# Altium PCB PCB3.PcbDoc
Units mil, origin at the board's own origin, x right, y up, seen from the top; angles counter-clockwise.
Board outline 3160 x 1180 mil, 4 copper layers (Top Layer, Layer 1, Layer 2, Bottom Layer), stack 23.756 mil thick; 41 components, 28 nets, 203 pads, 54 vias.
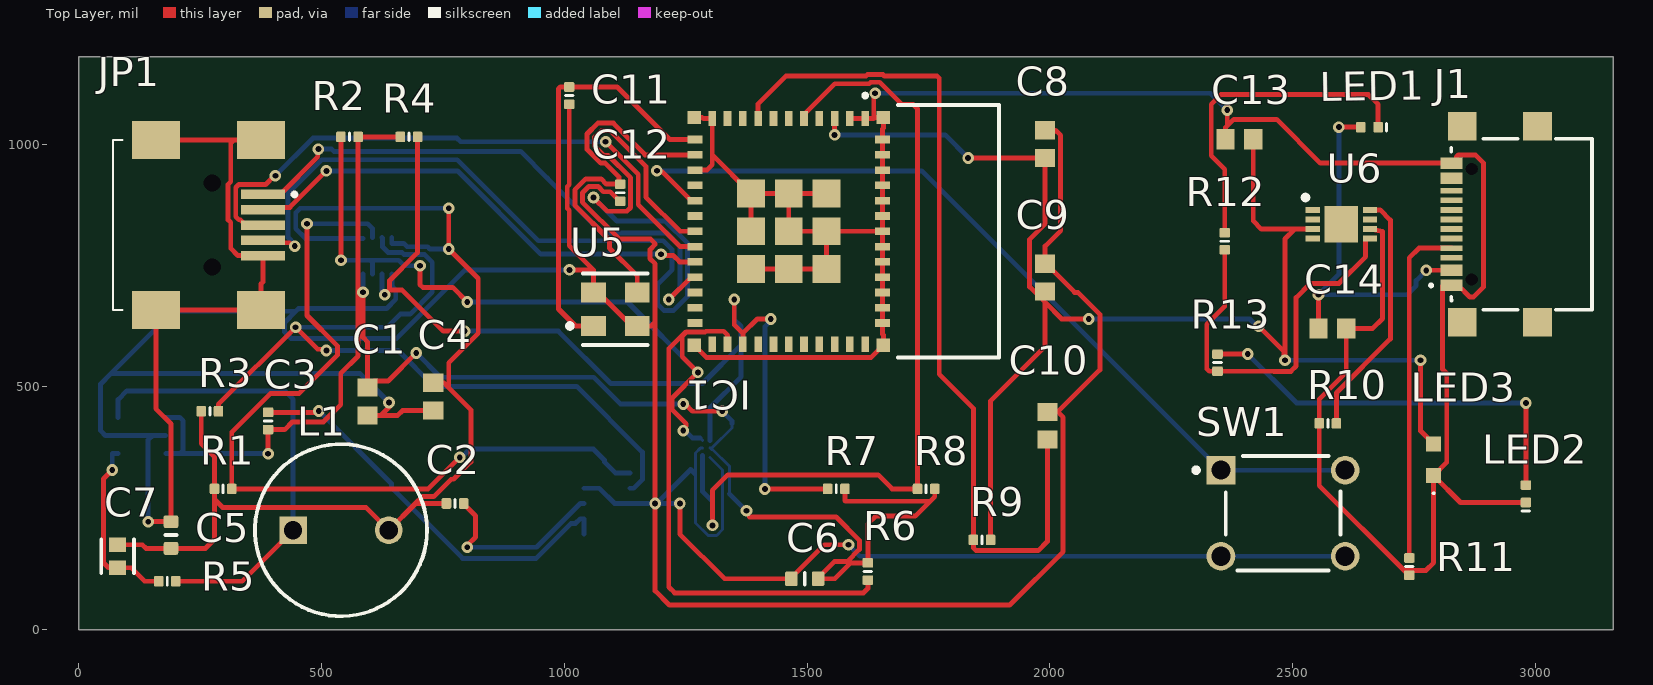
[diagram p0: Top Layer view]
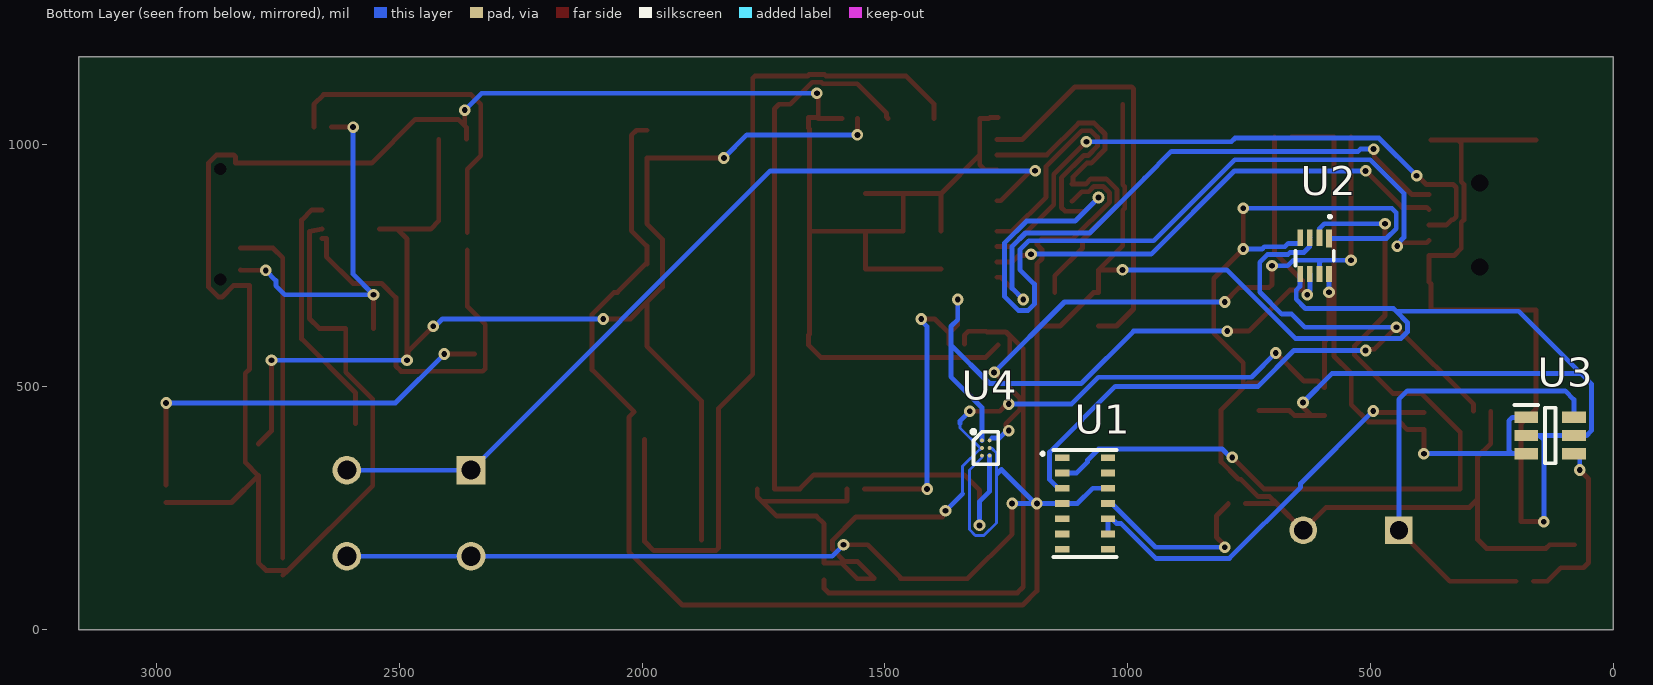
[diagram p1: Bottom Layer view, seen from below]
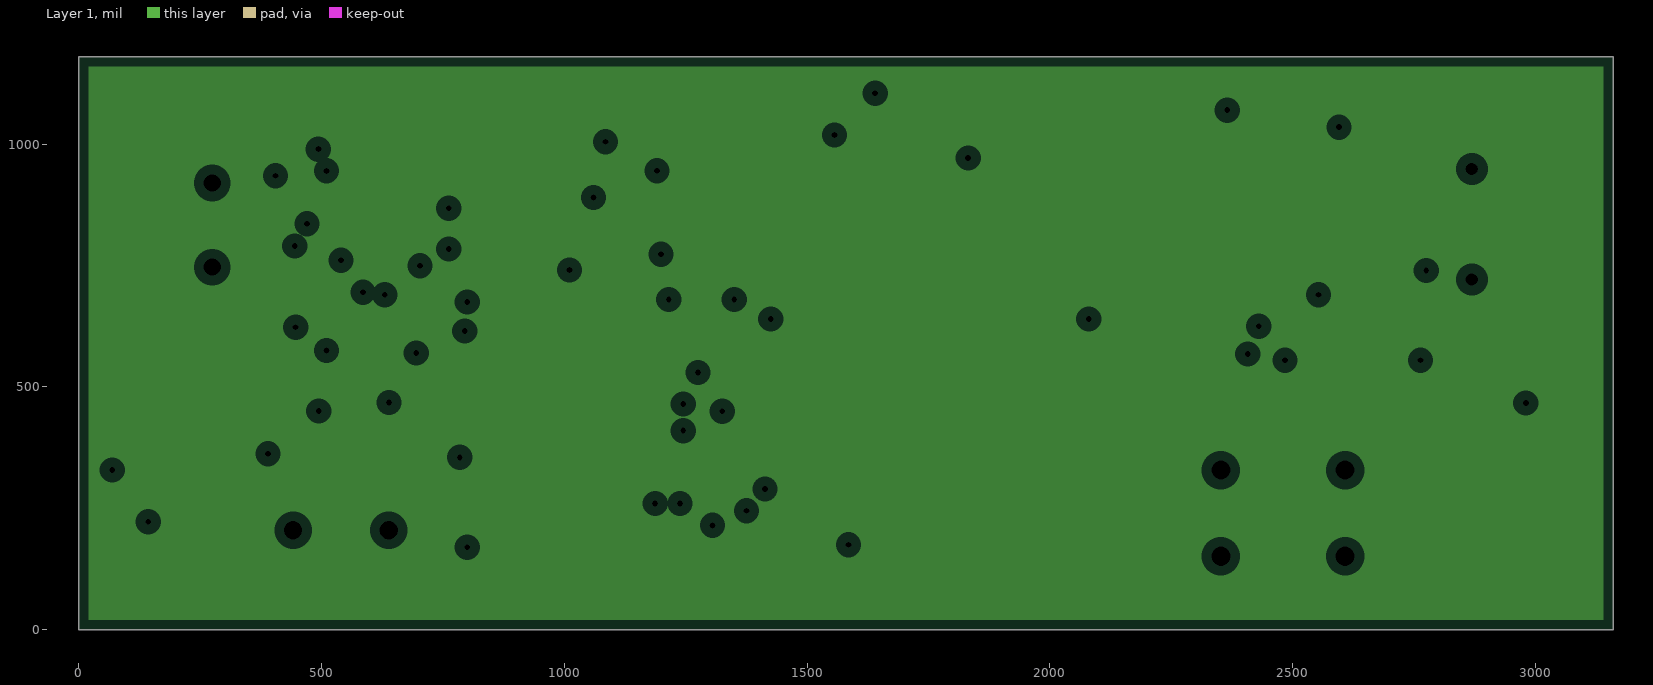
[diagram p2: Layer 1, clearances drawn from the general rule]
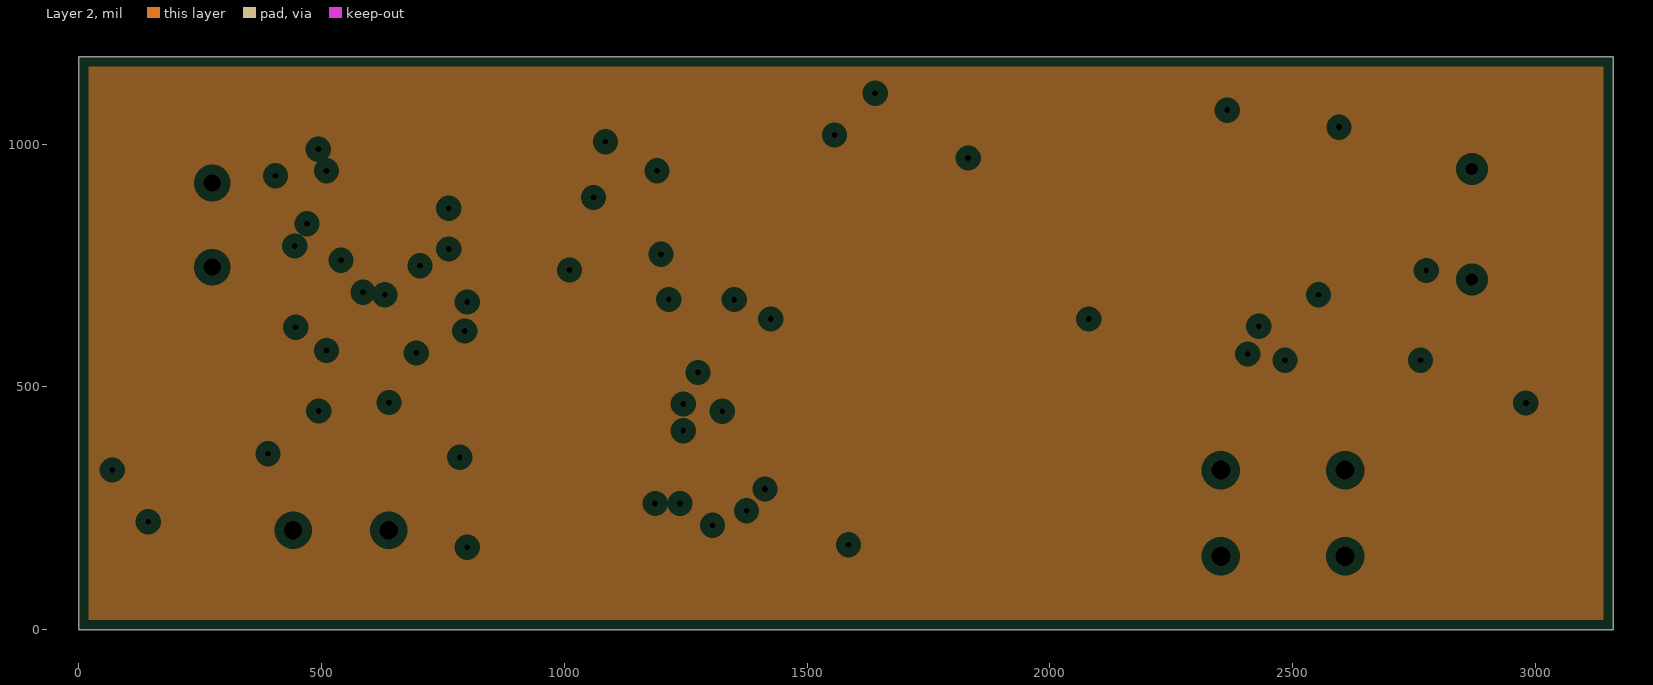
[diagram p3: Layer 2, clearances drawn from the general rule]
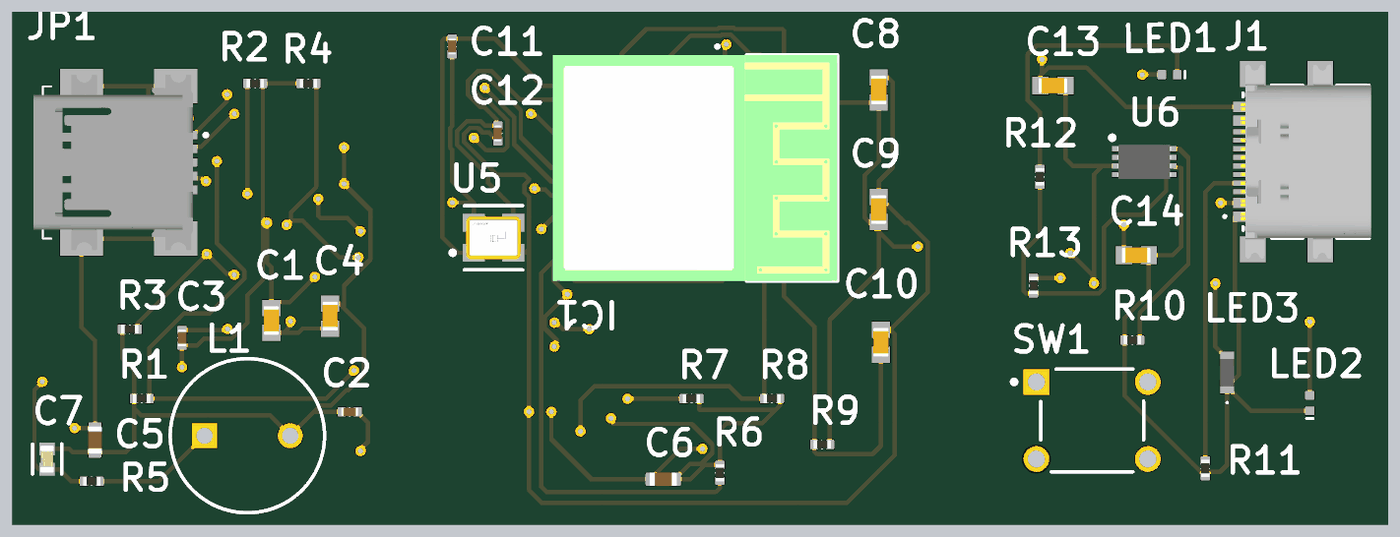
[diagram p4: 3D render of the assembled board from above, using the file's embedded part models]
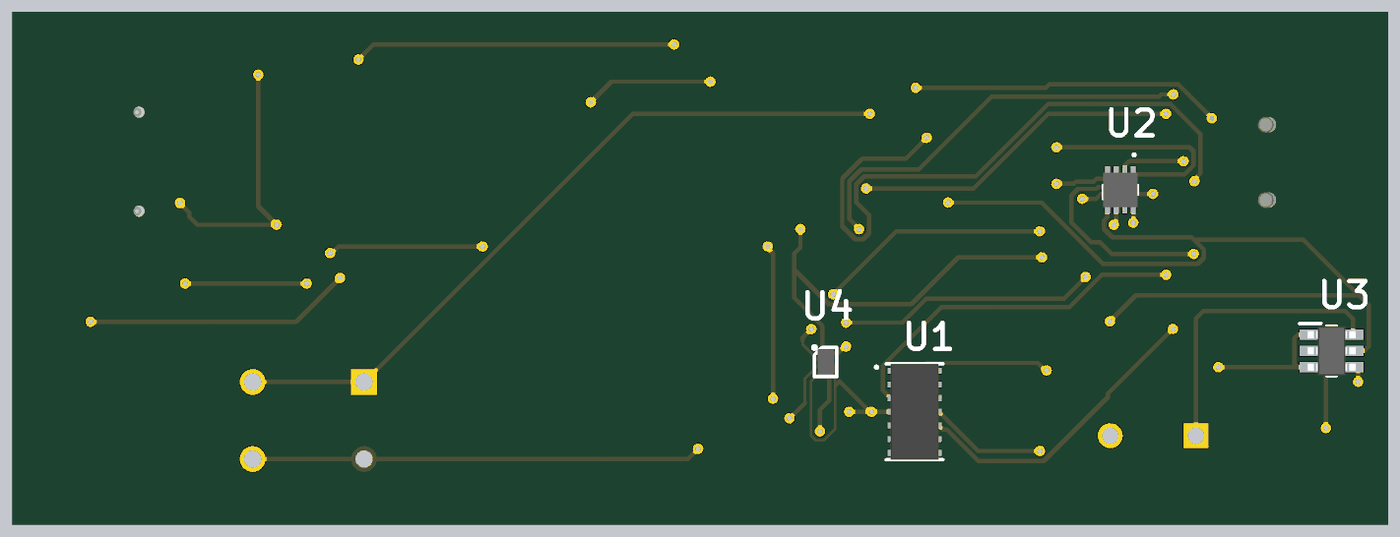
[diagram p5: 3D render of the assembled board from below, using the file's embedded part models]

## Layer stack, top to bottom
Top Solder: solder mask 0.472, FC-001, Dk 4
Top Solder: solder mask 0.4, Solder Resist, Dk 3.5
Top Layer: signal copper 1.4
Dielectric 2: prepreg 2.8, PP-006, Dk 4.1
Layer 1: plane copper 1.378
Dielectric 1: dielectric 12.6, FR-4, Dk 4.8
Layer 2: plane copper 1.378
Dielectric 3: prepreg 2.8, PP-006, Dk 4.1
Bottom Layer: signal copper 1.4
Flex Bottom Coverlay: solder mask 0.4, Solder Resist, Dk 3.5
Flex Bottom Coverlay: solder mask 0.472, FC-001, Dk 4

## Board outline
0,0 3160,0 3160,1180 0,1180
board region "Default Layer Stack Region": 835,0 0,0 0,1180 835,1180
board region "Default Layer Stack Region": 2245,1180 3160,1180 3160,0 2245,0
board region Flex2: 2125,1180 2245,1180 2245,0 2125,0
board region "Default Layer Stack Region": 965,1180 2125,1180 2125,0 965,0
board region Flex1: 835,1180 965,1180 965,0 835,0

## Design rules (kind name [scope] priority, off if disabled: settings)
Clearance Polygon_ANT [(InNamedPolygon('Top_Layer-GND')) or  (InNamedPolygon('Mid_Layer_1-GND')) or (InNamedPolygon('Mid_Layer_2-GND')) or (InNamedPolygon('Bottom_Layer-GND')) vs InNet('RF')] p1: gap=10 ignorepadtopadclearanceinfootprint=FALSE
Clearance Polygon [(InNamedPolygon('Top_Layer-GND')) or  (InNamedPolygon('Mid_Layer_1-GND')) or (InNamedPolygon('Mid_Layer_2-GND')) or (InNamedPolygon('Bottom_Layer-GND'))] p2: gap=10 ignorepadtopadclearanceinfootprint=FALSE except(0: Arc-Hole Track-Hole SMDPad-Hole THPad-Hole Via-Hole Fill-Hole Poly-Hole Region-Hole Text-Hole)
Clearance Clearance_Top [OnLayer('Top Layer')] p3: gap=5.71 ignorepadtopadclearanceinfootprint=FALSE except(0: Arc-Hole Track-Hole SMDPad-Hole THPad-Hole Via-Hole Fill-Hole Poly-Hole Region-Hole Text-Hole)
Clearance [All] p4: gap=5.91 ignorepadtopadclearanceinfootprint=FALSE
ComponentClearance [All] p1 off: gap=10 collisioncheckmode=3 verticalgap=10 showdistances=FALSE
DiffPairsRouting [All] p1: maxlimit=10 minlimit=10 mostfreqgap=10 toplayer_minwidth=15 toplayer_maxwidth=15 toplayer_prefwidth=15 bottomlayer_minwidth=15 bottomlayer_maxwidth=15 bottomlayer_prefwidth=15 substack1={EE8BA033-E28F-4276-8F34-0FAD93AC0668} toplayer_{ee8ba033-e28f-4276-8f34-0fad93ac0668}_minwidth=15 toplayer_{ee8ba033-e28f-4276-8f34-0fad93ac0668}_maxwidth=15 toplayer_{ee8ba033-e28f-4276-8f34-0fad93ac0668}_prefwidth=15 bottomlayer_{ee8ba033-e28f-4276-8f34-0fad93ac0668}_minwidth=15 bottomlayer_{ee8ba033-e28f-4276-8f34-0fad93ac0668}_maxwidth=15 bottomlayer_{ee8ba033-e28f-4276-8f34-0fad93ac0668}_prefwidth=15 maxuncoupledlength=500
FabricationTestPointUsage TestPointUsage [All] p1: valid=0 allowmultiple=FALSE
FabricationTestpoint Testpoint [All] p1: side=3 testpointundercomponent=TRUE minsize=40 maxsize=100 preferedsize=60 minholesize=0 maxholesize=40 preferedholesize=32 testpointgrid=1 allowsidetop=TRUE allowsidebottom=TRUE usegrid=TRUE gridtolerance=0.01
Height [All] p1 off: minheight=0 maxheight=1000 prefheight=500
HoleSize [All] p1: absolutevalues=TRUE maxlimit=396.22 minlimit=5.91 maxpercent=80.000 minpercent=20.000
MinimumAnnularRing [All] p1 off: minimumring=6
MinimumSolderMaskSliver [All] p1: minsoldermaskwidth=2
PlaneClearance [All] p1: clearance=20
PlaneConnect [All] p1: planeconnectstyle=Relief reliefexpansion=20 reliefentries=4 reliefconductorwidth=10 reliefairgap=10
PolygonConnect [All] p1: connectstyle=Relief reliefconductorwidth=10 reliefentries=4 polygonreliefangle="90 Angle" airgapwidth=10
RoutingVias [All] p1: holewidth=12 width=24 viastyle="Through Hole" minholewidth=3.94 minwidth=11.81 maxholewidth=12 maxwidth=24
SilkToSilkClearance [All] p1: silktosilkclearance=2
SilkToSolderMaskClearance SilkscreenOverComponentPads [IsPad] p1: minsilkscreentomaskgap=2 clearancetoexposedcopper=TRUE
SolderMaskExpansion [All] p1: expansion=2 istentingtop=FALSE
Width [OnLayer('Top Layer')] p1: maxlimit=20.08 minlimit=5.71 preferedwidth=10 substack1={EE8BA033-E28F-4276-8F34-0FAD93AC0668}
19 further rules are at their usual default settings.

## Classes and differential pairs
component class "Temp sensor": R6 R7 R8 U4
component class Protocol: JP1
component class Power: C13 C14 J1 LED1 LED2 LED3 R10 R11 R12 R13 U6
component class Microcontroller: C8 C9 C10 IC1 R9
component class "Heart rate and pulse oximeter": C1 C2 C3 C4 C5 C6 C7 L1 R1 R2 R3 R4 R5 U1 U2 U3
component class "Crystal Oscillator": C11 C12 U5
component class Button: SW1

## Components (designator, comment, footprint, x,y, rotation, side; value= is the part's Value field where it differs from the comment)
C1 "0.1uF" CAPC1608X90X35ML10T15 595,470 r90 top
C2 "Capacitor 1µF +/-20% 10V 0402" CAPC0402(1005)60_L 775,260 r0 top value=1µF
C3 "Capacitor 1µF +/-20% 10V 0402" CAPC0402(1005)60_L 390,430 r90 top value=1µF
C4 "0.1uF" CAPC1608X90X35ML10T15 730,480 r90 top
C5 "Capacitor 4.7µF +/-20% 10V 0603" CAPC0603(1608)100_L 190,195 r90 top value=4.7µF
C6 "Capacitor 4.7µF +/-20% 10V 0603" CAPC0603(1608)100_L 1495,105 r0 top value=4.7µF
C7 "5.6nF" FP-C0603C-CF-MFG 80,151.38 r90 top value="5,600 pF"
C8 "0.1uF" CAPC1608X90X35ML10T15 1990,1000 r90 top
C9 "0.1uF" CAPC1608X90X35ML10T15 1990,725 r90 top
C10 "0.1uF" CAPC1608X90X35ML10T15 1995,420 r90 top
C11 "Capacitor 12pF +/-10% 50V 0402" CAPC0402(1005)33_L 1010,1100 r90 top value=12pF
C12 "Capacitor 12pF +/-10% 50V 0402" CAPC0402(1005)33_L 1115,900 r90 top value=12pF
C13 "10uF" CAPC1608X90X35ML10T15 2390,1010 r0 top
C14 "10uF" CAPC1608X90X35ML10T15 2581.46,620 r0 top
IC1 "ESP32-C3-MINI-1-H4" ESP32C3MINI1H4 1462.09,820.51 r270 top
J1 "GSB1C41110SSHR" GSB1C41110SSHR 2960,835 r90 top
JP1 "690-005-299-043" 690005299043 70.28,833.39 r0 top
L1 "RLB9012-472KL" INDR70-500-1220X900X1220 540,205 r0 top value=4.7µH
LED1 "QBLP595-Y" QTB-QBLP595_V 2657.91,1035 r180 top
LED2 "QBLP595-Y" QTB-QBLP595_V 2980,280 r90 top
LED3 "CSL1001BT1C" CSL1001BT1C 2790,350 r0 top
R1 "4D7KR2F" RESC0402(1005)_L 297.28,290 r0 top value=4.7k
R2 "4D7KR2F" RESC0402(1005)_L 557.72,1015 r0 top value=4.7k
R3 "4D7KR2F" RESC0402(1005)_L 270,450 r0 top value=4.7k
R4 "4D7KR2F" RESC0402(1005)_L 680,1015 r0 top value=4.7k
R5 "4D7KR2F" RESC0402(1005)_L 182.28,100 r0 top value=4.7k
R6 "Resistor 5K6  +/-5 % 0402 63 mW" RESC0402(1005)_L 1625,120 r90 top value=5.6k
R7 "Resistor 5K6  +/-5 % 0402 63 mW" RESC0402(1005)_L 1560,290 r0 top value=5.6k
R8 "Resistor 5K6  +/-5 % 0402 63 mW" RESC0402(1005)_L 1745,290 r0 top value=5.6k
R9 "Resistor 2K2  +/-5 % 0402 63 mW" RESC0402(1005)_L 1860,185 r0 top value=2.2k
R10 "2KR2J" RESC0402(1005)_L 2572.28,425 r180 top value=2k
R11 "Resistor 4K7  +/-1 % 0402 63 mW" RESC0402(1005)_L 2740,130 r90 top value=4.7k
R12 "1KR2J" RESC0402(1005)_L 2360,800 r90 top value=1k
R13 "Resistor 4K7  +/-1 % 0402 63 mW" RESC0402(1005)_L 2345,550 r90 top value=4.7k
SW1 "B3F-1000" OMRON-B3F-1000-4_V 2480,240 r0 top
U1 "MAX30102EFD+" 14-LEAD-OESIP 1087.76,260 r180 bottom
U2 "MAX14595ETA+" MAX14595ETA 615,770 r0 bottom
U3 "MAX1921EUT18+" SOT95P280X145-6N 130,400 r180 bottom
U4 "TMP119AIYBGR" BGA6C40P2X3_95X149X52 1292.13,374.25 r180 bottom
U5 "ABM8-27.120MHZ-B4-T" FP-ABM8-MFG 1105,660 r0 top
U6 "MCP73831-2DCI_MC" SON50P300X200X100-9N-D 2600,835 r0 top

## Footprints (in the part's own frame and the unit in brackets; to place one, negate y for a bottom-side part, rotate by r counter-clockwise, add the part's x,y. Pads: shape width x height; smd on the part's side, far side on the other; paste and mask are expansions set on the pad)
14-LEAD-OESIP [mm]
  rect 0.75x0.35 smd: 1(-1.2,2.4) 2(-1.2,1.6) 3(-1.2,0.8) 4(-1.2,0) 5(-1.2,-0.8) 6(-1.2,-1.6) 7(-1.2,-2.4) 8(1.2,-2.4) 9(1.2,-1.6) 10(1.2,-0.8) 11(1.2,0) 12(1.2,0.8) 13(1.2,1.6) 14(1.2,2.4)
  silkscreen extent -2.28,-2.8 1.65,2.8, body extent -1.4,-2.8 1.4,2.8, height 1.3
690005299043 [mm]
  rect 2.3x0.5 smd: 1(7.85,1.6) 2(7.85,0.8) 3(7.85,0) 4(7.85,-0.8) 5(7.85,-1.6)
  rect 2.5x2 smd: 6(7.75,-4.45) 7(7.75,4.45) 8(2.25,4.45) 9(2.25,-4.45)
  round 0.45 hole 0.9 unplated: 10(5.2,2.2) 11(5.2,-2.2)
  silkscreen extent 0,-4.45 9.6,4.45, body extent -0.54,-5.13 8.76,5.13, height 3.9
BGA6C40P2X3_95X149X52 [mm]
  round 0.2 smd: A1(-0.2,0.4) A2(0.2,0.4) B1(-0.2,0) B2(0.2,0) C1(-0.2,-0.4) C2(0.2,-0.4)
  silkscreen extent -0.75,-0.85 0.65,0.95, body extent -0.48,-0.74 0.48,0.74, height 0.53
CAPC0402(1005)33_L [mm] "Chip Capacitor, Body 1.0x0.5mm, Height 0.33mm, IPC High Density"
  rrect25% 0.5x0.55 smd: 1(-0.45,0) 2(0.45,0)
  silkscreen extent 0,-0.2 0,0.2, body extent -0.5,-0.25 0.5,0.25, height 0.55
CAPC0402(1005)60_L [mm] "Chip Capacitor, Body 1.0x0.5mm, Height 0.6mm, IPC High Density"
  rrect25% 0.5x0.55 smd: 1(-0.45,0) 2(0.45,0)
  silkscreen extent 0,-0.2 0,0.2, body extent -0.5,-0.25 0.5,0.25, height 0.6
CAPC0603(1608)100_L [mil] "Chip Capacitor, Body 1.6x0.8mm, Height 1.0mm, IPC High Density"
  rrect25% 26x29.92 smd: 1(-27.56,0) 2(27.56,0)
  silkscreen extent 0,-12 0,12, body extent -31,-16 31,16, height 37
CAPC1608X90X35ML10T15 [mm] "Chip Capacitor, 2-Leads, Body 1.7x0.9mm, IPC Low Density"
  rect 0.95x1.05 smd: 1(-0.725,0) 2(0.725,0)
  body extent -0.85,-0.45 0.85,0.45, height 0.9
CSL1001BT1C [mm]
  rect 0.8x0.8 smd: 1(0,-0.825) 2(0,0.825)
  silkscreen extent -0.05,-1.8 0.05,-1.7, body extent -0.4,-0.8 0.4,0.8, height 1.26
ESP32C3MINI1H4 [mm]
  rect 0.8x0.4 smd: 1(-5.9,4) 2(-5.9,3.2) 3(-5.9,2.4) 4(-5.9,1.6) 5(-5.9,0.8) 6(-5.9,0) 7(-5.9,-0.8) 8(-5.9,-1.6) 9(-5.9,-2.4) 10(-5.9,-3.2) 11(-5.9,-4) 25(5.9,-4) 26(5.9,-3.2) 27(5.9,-2.4) 28(5.9,-1.6) 29(5.9,-0.8) 30(5.9,0) 31(5.9,0.8) 32(5.9,1.6) 33(5.9,2.4) 34(5.9,3.2) 35(5.9,4)
  rect 0.4x0.8 smd: 12(-4.8,-4.9) 13(-4,-4.9) 14(-3.2,-4.9) 15(-2.4,-4.9) 16(-1.6,-4.9) 17(-0.8,-4.9) 18(0,-4.9) 19(0.8,-4.9) 20(1.6,-4.9) 21(2.4,-4.9) 22(3.2,-4.9) 23(4,-4.9) 24(4.8,-4.9) 36(4.8,4.9) 37(4,4.9) 38(3.2,4.9) 39(2.4,4.9) 40(1.6,4.9) 41(0.8,4.9) 42(0,4.9) 43(-0.8,4.9) 44(-1.6,4.9) 45(-2.4,4.9) 46(-3.2,4.9) 47(-4,4.9) 48(-4.8,4.9)
  rect 1.45x1.45 smd: 49(0,0) 50(1.975,1.975) 51(0,1.975) 52(-1.975,1.975) 53(-1.975,0) 54(-1.975,-1.975) 55(0,-1.975) 56(1.975,-1.975) 57(1.975,0)
  rect 0.7x0.7 smd: 58(-5.95,4.95) 59(-5.95,-4.95) 60(5.95,-4.95) 61(5.95,4.95)
  silkscreen extent -7.2,3.9 6.6,11, body extent -6.6,-5.6 6.6,11, height 2.4
FP-ABM8-MFG [mm]
  rect 1.3x1.05 smd paste+0 mask+0: 1(-1.15,-0.875) 2(1.15,-0.875) 3(1.15,0.875) 4(-1.15,0.875)
  silkscreen extent -2.5,-1.87 1.7,1.87, body extent -1.9,-1.5 1.9,1.5, height 0.25
FP-C0603C-CF-MFG [mm]
  rect 0.75x0.9 smd paste+0 mask+0: 1(-0.6,0) 2(0.6,0)
  silkscreen extent -0.87,-0.85 0.88,0.85, body extent -1.2,-0.6 1.2,0.6, height 0.25
GSB1C41110SSHR [mm]
  rect 0.6x1.15 smd: A1(-3.2,3.39) A4(-2.4,3.39) A9(2.4,3.39) A12(3.2,3.39)
  rect 0.3x1.15 smd: A5(-1.25,3.39) A6(-0.25,3.39) A7(0.25,3.39) A8(1.25,3.39) B5(1.75,3.39) B6(0.75,3.39) B7(-0.75,3.39) B8(-1.75,3.39)
  round 0.325 hole 0.65 unplated: MH1(-2.89,2.315) MH2(2.89,2.315)
  rect 1.5x1.5 smd: MP1(-5.12,2.815) MP2(5.12,2.815) MP3(-5.12,-1.115) MP4(5.12,-1.115)
  silkscreen extent -4.47,-3.96 4.47,4.5, body extent -5.67,-4.09 5.67,3.51, height 3.12
INDR70-500-1220X900X1220 [mm] "THD, 2-Leads, Dia 9mm"
  rect 1.45x1.45 hole 0.95: 1(-2.5,0)
  round 1.45 hole 0.95: 2(2.5,0)
  silkscreen extent -4.5,-4.5 4.5,4.5, body extent -4.5,-4.5 4.5,4.5, height 12.2
MAX14595ETA [mm]
  rect 0.3x0.95 smd: 1(-0.75,-0.9)
  rect 0.3x0.85 smd: 2(-0.25,-0.95) 3(0.25,-0.95) 4(0.75,-0.95) 5(0.75,0.95) 6(0.25,0.95) 7(-0.25,0.95) 8(-0.75,0.95)
  silkscreen extent -1,-2.1 1,0.5, body extent -1,-1 1,1, height 0.9
OMRON-B3F-1000-4_V [mm] "TH, 4-Leads, Body 6x6mm"
  rect 1.5x1.5 hole 1 paste-2539.97: 1(-3.25,2.25)
  round 1.5 hole 1 paste-2539.97: 2(3.25,2.25) 4(3.25,-2.25)
  round 1.5 hole 1 paste-2539.97 mask+0.102: 3(-3.25,-2.25)
  silkscreen extent -4.67,-3 3,3, body extent -3,-3 3,3, height 4.5
QTB-QBLP595_V [mm] "SMD, 2-Leads, Body 1x0.5mm"
  rrect25% 0.5x0.55 smd: 1(-0.455,0) 2(0.455,0)
  silkscreen extent -0.9,-0.2 -0.9,0.2, body extent -0.5,-0.25 0.5,0.25, height 0.5
RESC0402(1005)_L [mm] "Chip Resistor, Body 1.0x0.5mm, IPC High Density"
  rrect25% 0.5x0.55 smd: 1(-0.45,0) 2(0.45,0)
  silkscreen extent 0,-0.2 0,0.2, body extent -0.5,-0.25 0.5,0.25, height 0.3
SON50P300X200X100-9N-D [mm]
  rect 0.75x0.3 smd: 1(-1.5,0.75) 2(-1.5,0.25) 3(-1.5,-0.25) 4(-1.5,-0.75) 5(1.5,-0.75) 6(1.5,-0.25) 7(1.5,0.25) 8(1.5,0.75)
  rect 1.75x1.9 smd: 9(0,0)
  silkscreen extent -2,1.28 -1.75,1.52, body extent -1.55,-1 1.55,1, height 1
SOT95P280X145-6N [mm]
  rect 1.25x0.6 smd: 1(-1.25,0.95) 2(-1.25,0) 3(-1.25,-0.95) 4(1.25,-0.95) 5(1.25,0) 6(1.25,0.95)
  silkscreen extent -1.87,-1.45 0.27,1.6, body extent -1.4,-1.45 1.4,1.45, height 1.45

## Part data
C1 C4 C8 C9 C10 C13 C14: library part CMP-2100-03643-1, "Chip Capacitor, 0.1 uF, +/- 10%, 50 V, -55 to 125 degC, 0603 (1608 Metric), RoHS, Tape and Reel", Capacitance=100nF, Case Code (Imperial)=0603, Case Code (Metric)=1608, Dielectric=X7R, Dielectric Material=Ceramic, Insulation Resistance=10GR, Manufacturer=Murata, Max Operating Temperature=125degC, Min Operating Temperature=-55degC, Package Description="2-Pin Surface Mount Device, Body 1.6 x 0.8 mm", Package Quantity=1, Tolerance=10%, Voltage=50V, Case/Package=0603, Contact Plating=Tin, Datasheet URL=http://psearch.en.murata.com/capacitor/product/GRM188R71H104KA93%23.pdf, Datasheet Version=42675.0, Depth=0.8mm, Height=0.8mm, Lead Free=LeadFree, Length=1.6mm, Manufacturer URL=http://www.murata.com/, Material=Ceramic, Mount=SurfaceMount, Number of Pins=2, Package Reference=0603, Packaging=TapeandReel, Radiation Hardening=No, REACH SVHC=NoSVHC, RoHSCompliant=true, Termination=SMD/SMT, Thickness=0.035inch, Voltage Rating=50V, Voltage Rating (DC)=50V, Width=0.8mm
C2 C3: library part CMP-001-00063-3, "Chip Capacitor, 1µF +/-20%, 10V, 0402, Thickness 0.6 mm", Case/Package=0402, Max Operating Temperature=85°C, Min Operating Temperature=-55°C, Tolerance=10%, Voltage Rating=10V, Mounting Technology=SMT, Pins=2
C5 C6: library part CMP-001-00076-4, "Chip Capacitor, 4.7µF +/-20%, 10V, 0603, Thickness 1 mm", Case/Package=0603, Max Operating Temperature=85°C, Min Operating Temperature=-55°C, Tolerance=10%, Voltage Rating=10V, Mounting Technology=SMT, Pins=2
C7: library part CMP-2006-03359-2, "CAP CER 5600PF 50V NP0 0603", Capacitance="5,600 pF", Manufacturer=KEMET, Manufacturer Part Number=C0603C562J5GACTU, Package=C0603C-CF, Temperature="-55°C to +125°C", Temperature Characteristic=C0G, Temperature Coefficient=30ppm/°C, Temperature Range High=+125°C, Temperature Range Low=-55°C, Tolerance=0.05, Voltage Rating="50 V", Automotive=Yes, Automotive Grade="Grade 1", Category=Cap, ComponentLink2Description=Datasheet, ComponentLink2URL=https://api.kemet.com/component-edge/download/datasheet/C0603C100J5GACAUTO.pdf, Device Class L1="Passive Components", Device Class L2=Capacitors, Device Class L3="Ceramic Capacitors", Digikey Description="CAP CER 5600PF 50V NP0 0603", Height=0.87mm, Lead Free=Yes, Material=Ceramic, Mouser Description="Multilayer Ceramic Capacitors MLCC - SMD/SMT 50volts 5600pF 5% C0G", Octopart=https://octopart.com/c0603c562j5gactu-kemet-13174209, RoHS=TRUE
C11 C12: library part CMP-001-00072-4, "Chip Capacitor, 12pF +/-10%, 50V, 0402, Thickness 0.33 mm", Case/Package=0402, Max Operating Temperature=85°C, Min Operating Temperature=-55°C, Tolerance=20%, Voltage Rating=50V, Mounting Technology=SMT, Pins=2
IC1: "Integrated Circuit", Manufacturer_Name="Espressif Systems", Mouser Part Number=356-ESP32-C3-MINI1H4, Datasheet Link=https://www.mouser.es/datasheet/2/891/Espressif_ESP32_C3_MINI_1_Datasheet-2006822.pdf, Height=2.55mm, Manufacturer_Part_Number=ESP32-C3-MINI-1-H4, Mouser Price/Stock=https://www.mouser.co.uk/ProductDetail/Espressif-Systems/ESP32-C3-MINI-1-H4?qs=stqOd1AaK78JkwNX13Q9hQ%3D%3D
J1: "Connector", Manufacturer_Name="Amphenol Communications Solutions", Datasheet Link=https://cdn.amphenol-cs.com/media/wysiwyg/files/drawing/gsb1c41x10sshr-ax1.pdf, Height=3.41mm, Manufacturer_Part_Number=GSB1C41110SSHR
JP1: "Connector", Manufacturer_Name=EDAC, Mouser Part Number=587-690-005-299-043, Datasheet Link=https://datasheet.datasheetarchive.com/originals/distributors/Datasheets-DGA2/216278.pdf, Height=3.98mm, Manufacturer_Part_Number=690-005-299-043, Mouser Price/Stock=https://www.mouser.co.uk/ProductDetail/EDAC/690-005-299-043?qs=Vpv2%252BhtnxQIs8OWWDFbyVg%3D%3D
L1: library part CMP-006-00016-6, "Radial Inductor, 4.7 mH, +/- 10%, 0.24 A, -55 to 125 degC, 2-Pin THD, RoHS, Bulk", Case/Package=Radial, Current Rating=240mA, Inductance Tolerance=5%, Manufacturer=Bourns, Max Operating Temperature=125°C, Min Operating Temperature=-55°C, Package Description="2-Pin Through Hole Device, Dia 9 mm, Height 12.2 mm", Package Quantity=200, Package Reference=INDR70-500-1220X900X1220, Self Resonant Frequency=500kHz, Tolerance=10%, Core Material=Ferrite, Datasheet URL=http://www.bourns.com/docs/Product-Datasheets/rlb9012.pdf, Datasheet Version=Mar-15, Lead Pitch=5mm, Mounting Technology=TH, Packaging=Bulk, Pins=2, Q Factor=15, RoHS Compliant=True, Shielding=Unshielded
LED1 LED2: library part CMP-007-00043-3, "Chip LED 0402, Yellow, 0.02 A, 3.1 to 3.7 V, -40 to 80 degC, 2-Pin SMD, RoHS, Tape and Reel", Case/Package=0402, Colour=Yellow, Mounting Technology=SMT, Pins=2, RoHS Compliant=Yes
LED3: "LED", Manufacturer_Name="ROHM Semiconductor", Mouser Part Number=755-CSL1001BT1C, Datasheet Link=https://fscdn.rohm.com/en/products/databook/datasheet/opto/led/chip_mono/csl1001bt1(c)-e.pdf, Height=1.16mm, Manufacturer_Part_Number=CSL1001BT1C, Mouser Price/Stock=https://www.mouser.co.uk/ProductDetail/ROHM-Semiconductor/CSL1001BT1C?qs=HoCaDK9Nz5fqNTX3Pg0ReA%3D%3D
R1 R2 R3 R4 R5: library part CMP-009-00105-2, "4K7 0.063W 1% 0402 (1005 Metric)  SMD", Case/Package=0402, Power=63mW, Tolerance=1%, Mounting Technology=SMT, Pins=2
R6 R7 R8: library part CMP-009-00136-3, "Chip Resistor, 5,6 kOhms, +/-5 %, 63 mW, -55 to 155 degC, 0402", Case/Package=0402, Max Operating Temperature=155°C, Min Operating Temperature=-55°C, Power=63mW, Tolerance=5%, Pins=2
R9: library part CMP-009-00166-3, "Chip Resistor, 2,2 kOhms, +/-5 %, 63 mW, -55 to 155 degC, 0402", Case/Package=0402, Max Operating Temperature=155°C, Min Operating Temperature=-55°C, Power=63mW, Tolerance=5%, Pins=2
R10: library part CMP-009-00091-2, "2K 0.063W 5% 0402 (1005 Metric)  SMD", Case/Package=0402, Power=63mW, Tolerance=5%, Mounting Technology=SMT, Pins=2
R11 R13: library part CMP-009-00158-3, "Chip Resistor, 4,7 kOhms, +/-1 %, 63 mW, -55 to 155 degC, 0402", Case/Package=0402, Max Operating Temperature=155°C, Min Operating Temperature=-55°C, Power=63mW, Tolerance=1%, Pins=2
R12: library part CMP-009-00075-2, "1K 0.063W 5% 0402 (1005 Metric)  SMD", Case/Package=0402, Power=63mW, Tolerance=5%, Mounting Technology=SMT, Pins=2
SW1: library part CMP-1677-00002-1, "Tactile Switch, SPST-NO, 0.05 A, 5 to 24 V, -25 to 70 degC, 4-Pin THD, RoHS, Bulk", Capacitance="-45 f", Current Rating="1.5 A", Max Operating Temperature="70 degC", Min Operating Temperature="-40 degC", Package Quantity=1080, Voltage Rating="150 V", ComponentLink1Description="Manufacturer URL", ComponentLink1URL=http://www.omron.com/, ComponentLink2Description=Datasheet, ComponentLink2URL=http://www.omron.com/ecb/products/pdf/en-b3f.pdf, Contact Material=Brass, Contact Plating=Gold, DatasheetVersion=Jan-15, Gender=Female, Height="14.99 mm", Lead Pitch="1.27 mm", Length="18.34 mm", Mount="Through Hole", PackageDescription="4-Pin Through Hole Device, Body 6 x 6 mm", PackageReference=B3F-1000, Packaging=Tray, Pins=8, Radiation Hardening=No, RoHSCompliant=true, Shielding=Shielded, Width="25.4 mm"
U1: "Integrated Circuit", Manufacturer_Name="Analog Devices", Mouser Part Number=700-MAX30102EFD+, Datasheet Link=https://datasheets.maximintegrated.com/en/ds/MAX30102.pdf, Manufacturer_Part_Number=MAX30102EFD+, Mouser Price/Stock=https://www.mouser.co.uk/ProductDetail/Analog-Devices-Maxim-Integrated/MAX30102EFD%2b?qs=nVS1qgv%252BQrk9UYEvS27V%2Fg%3D%3D
U2: "Integrated Circuit", Manufacturer_Name="Analog Devices", Mouser Part Number=700-MAX14595ETA+, Datasheet Link=https://www.mouser.it/datasheet/2/256/MAX14595-471922.pdf, Height=0.8mm, Manufacturer_Part_Number=MAX14595ETA+, Mouser Price/Stock=https://www.mouser.co.uk/ProductDetail/Maxim-Integrated/MAX14595ETA%2b?qs=Or6ezLSzmEvDejm1TC8ZVA%3D%3D
U3: "Integrated Circuit", Manufacturer_Name="Analog Devices", Datasheet Link=https://datasheet.datasheetarchive.com/originals/distributors/SFDatasheet-4/sf-00087114.pdf, Height=1.45mm, Manufacturer_Part_Number=MAX1921EUT18+
U4: "Integrated Circuit", Manufacturer_Name="Texas Instruments", Mouser Part Number=595-TMP119AIYBGR, Datasheet Link=https://www.ti.com/lit/ds/symlink/tmp119.pdf?ts=1711471230059&ref_url=https%253A%252F%252Fwww.ti.com%252Fsitesearch%252Fen-us%252Fdocs%252Funiversalsearch.tsp%253FlangPref%253Den-US%2526searchTerm%253Dtmp119%2526nr%253D70, Height=0.525mm, Manufacturer_Part_Number=TMP119AIYBGR, Mouser Price/Stock=https://www.mouser.co.uk/ProductDetail/Texas-Instruments/TMP119AIYBGR?qs=dbcCsuKDzFUz%2FSabBerKMA%3D%3D
U5: library part CMP-27762-000994-1, "Crystal 27.12MHz ±30ppm 18pF SMD-4 3.2mm x 2.5mm", Capacitance=1.8E-11F, Case/Package=SMD/SMT, ESR (Equivalent Series Resistance)=50R, Frequency=27.12MHz, Frequency Stability=50ppm, Frequency Tolerance=30ppm, Load Capacitance=18pF, Max Operating Temperature=70°C, Min Operating Temperature=-20°C, Height=0.031inch, Lead Free="Lead Free", Length=0.126inch, Mount="Surface Mount", Packaging="Tape and Reel", RoHS Compliant=Yes, Width=0.098inch
U6: "Integrated Circuit", Arrow Part Number=MCP73831-2DCI/MC, Manufacturer_Name=Microchip, Mouser Part Number=579-MCP73831-2DCI/MC, Arrow Price/Stock=https://www.arrow.com/en/products/mcp73831-2dcimc/microchip-technology?region=nac, Datasheet Link=https://www.arrow.com/en/products/mcp73831-2dcimc/microchip-technology, Height=1mm, Manufacturer_Part_Number=MCP73831-2DCI/MC, Mouser Price/Stock=https://www.mouser.co.uk/ProductDetail/Microchip-Technology/MCP73831-2DCI-MC?qs=hH%252BOa0VZEiBQ%2FrptDRXKdg%3D%3D

## Via types
v1: diameter 24, hole 12, Top Layer to Bottom Layer, 54 vias

## Nets (pads, with @x,y where several pads share a name; then routed paths per layer and width w, separated by ;. In a path a pad name is that pad's centre, name@x,y a point inside that pad or via, vN(x,y) a via of type N, cw(c..) or ccw(c..) an arc to the next point about the centre after c; other vN are vias at no path point)
1.8V: C2.1 C4.2 C5.1 C7.2 L1.2 R1.1 R3.1 U2.1 U2.4 | length 2422.1
  Top Layer w10: C7.2 131,175 138.56,167.44 C5.1 261.01,167.44 279.57,186 279.57,268.43 ; R3.1 252.28,383.28 279.57,356 R1.1 279.57,268.43 ; C4.2 752,508.54 762,498.54 ; C2.1 693.43,260 ; v1(762,868) v1(762,784) 822.71,723.29 822.71,610.59 762,549.89 762,498.54 ; 279.57,268.43 296,252 591.43,252 L1.2 693.43,260 ; 693.43,260 707.72,274.29 731.13,274.29 766.79,309.94 771.77,309.94 807.42,345.59 807.42,453.13 762,498.54
  Bottom Layer w10: U2.1 585.47,806 467,806 447,826 447,859 456,868 v1(762,868) ; U2.4 644.53,796.58 645.43,795.67 669.32,795.67 676.27,788.72 718.46,788.72 723.18,784 v1(762,784)
CHIP_EN: C10.1 IC1.8 R9.1 | length 1799.8
  Top Layer w10: IC1.8 1399.09,1083 1456.09,1140 1620.96,1140 1624.09,1143.13 1655.91,1143.13 1659.04,1140 1768,1140 1772,1136 1772,526.28 1842.28,456 R9.1 1842.28,168.72 1848,163 1976,163 1995,182 C10.1
GND: C1.1 C4.1 C5.2 C6.1 C8.2 C9.2 C10.2 C11.1 C12.1 JP1.5 JP1.6 JP1.7 JP1.8 JP1.9 SW1.3 SW1.4 U1.4 U1.12 U2.5 U3.2 U3.5 U4.B2 U4.C1 U5.2 U5.4 | length 9734.5
  Top Layer w10: v1(143,222.56) C5.2 190,424 158.86,455.14 JP1.9 JP1.6 375.39,712 379.33,715.94 JP1.5 328,770.39 313,785.39 313,838.73 307.64,844.1 307.64,917.16 313,922.53 313,1002 319.58,1008.58 ; JP1.8 319.58,1008.58 ; JP1.7 319.58,1008.58 ; C1.1 622.46,441.46 ; v1(639,468) 639,458 622.46,441.46 ; C4.1 667,451.46 657,441.46 622.46,441.46 ; C11.1 1010,916.55 1005.87,912.42 1005.87,867.58 1010,863.45 1010,790.72 1059.72,741 ; v1(1010.71,741) 1059.72,741 ; C12.1 1114.02,882.28 1094.29,902.01 1080.11,902.01 1069.41,912.71 1050.59,912.71 1037.29,899.41 1037.29,880.59 1113.08,804.8 1177.2,804.8 1187,795 1187,793.43 1176.39,782.82 1176.39,764.01 1187,753.39 1187,634 ; v1(1238,260) 1238,197 1330,105 C6.1 1467.44,106.96 1535.48,175 v1(1585,175) ; C8.2 2011.46,1028.54 2022,1018 2022,822 1990,790 C9.2 1991.97,753.54 2050.89,694.62 2057.49,694.62 2102.71,649.41 2102.71,535.25 2016,448.54 2027,437.54 2027,161 1917,51 1216,51 1187,80 v1(1187,260) 1187,634 ; 1059.72,741 U5.4 1070,694.45 1138.9,625.55 U5.2 1178.55,625.55 1187,634
  Bottom Layer w6: U4.B2 1283.89,373.89 1279.98,373.89 1270.35,364.26 1270.35,220.09 1296.34,194.09 1313.66,194.09 1325.91,206.34 1325.91,329.25 U4.C1@1300.16,355
  Bottom Layer w10: v1(143,222.56) 143,391 152,400 ; U3.2 152,400 ; v1(639,468) 579,528 67,528 ; U2.5 645.43,731.69 645.43,706.96 652.91,699.49 652.91,680.51 633.89,661.5 452.76,661.5 447.26,656 ; v1(1010.71,741) 795.89,741 654.98,600.09 437.16,600.09 423.75,613.51 423.75,632.49 447.26,656 ; U1.12 1072,291.5 1103.5,260 U1.4 v1(1187,260) v1@1190,260 ; v1(1238,260) v1@1190,260 ; 1268.35,321.65 1260,330 v1@1190,260 ; v1(1585,175) 1608.58,151.42 SW1.3 SW1.4 ; 67,528 195,656 447.26,656 ; 67,528 45,506 45,410 55,400 U3.5 152,400
GPIO2: IC1.5 R8.1 U4.C2 | length 1746.4
  Top Layer w10: v1(1305,215) 1305,287.22 1336.78,319 1646,319 1675,290 R8.1 1727.28,1072.72 1718,1082 1694.82,1082 1649.41,1127.42 1630.59,1127.42 1627.47,1124.29 1557.2,1124.29 1496.46,1063.54 1496.46,1055.67 IC1.5
  Bottom Layer w10: U4.C2 1284.25,285 1305,264.25 v1(1305,215)
GPIO18: IC1.26 R2.1 R6.1 U2.7 U4.A2 | length 2525.1
  Top Layer w10: v1(540,761) R2.1 ; v1(702.67,749.63) 702.67,710.86 708.53,705 770,705 v1(800,675) ; v1(1245,410) 1245,413.79 1250.86,419.65 1250.86,424.14 1222.29,452.71 1222.29,477.29 v1(1275,530) 1242.72,562.28 1242.72,604.48 1250.24,612 ; IC1.26 1336.1,606.58 1328,614.68 1291.09,614.68 1289.36,612.95 1251.19,612.95 1250.24,612 ; R6.1 1625,85 1616,76 1227,76 1215,88 1215,579 1248,612 1250.24,612
  Bottom Layer w6: 1280,395 1280,394.76 1284.25,390.51 U4.A2
  Bottom Layer w10: v1(540,761) 600,761 ; U2.7 605.16,755.84 600,761 ; v1(702.67,749.63) 670.37,749.63 659,761 600,761 ; v1(800,675) 1130,675 v1(1275,530) ; v1(1245,410) 1248.79,410 1263.79,395 1280,395
GPIO19: IC1.27 R4.2 R7.1 U2.6 U4.A1 | length 2210
  Top Layer w10: v1(630,690) 640,700 ; R4.2 697.72,776.72 693.33,772.33 693.26,772.33 640,719.07 640,700 ; v1(795,615) 750.5,615 665.5,700 640,700 ; v1(1350,680) 1350,627.79 1367.6,610.2 ; IC1.27 1367.6,610.2 ; v1(1413,290) R7.1 ; v1(1425,640) 1397.4,640 1367.6,610.2
  Bottom Layer w10: U2.6 624.84,698.95 630,693.79 v1(630,690) ; v1(795,615) 987.69,615 1095.59,507.09 1284.49,507.09 1364,586.61 ; U4.A1 1300,457.39 1364,521.39 1364,586.61 ; v1(1350,680) 1350,638.41 1364,624.41 1364,586.61 ; v1(1413,290) 1413,624.21 1425,636.21 v1(1425,640)
NetC2_2: C2.2 U1.11 | length 385
  Top Layer w10: C2.2 792.72,259.02 817.09,234.64 817.09,190.88 800,173.79 v1(800,170)
  Bottom Layer w10: v1(800,170) 835,170 942.64,170 1032.64,260 U1.11
NetC3_2: C3.2 U1.9 U1.10 | length 847
  Top Layer w10: C3.2 487.76,447.72 490.63,450.58 v1(494.42,450.58)
  Bottom Layer w10: v1(494.42,450.58) 643.8,301.2 643.8,293.8 790.51,147.09 835,147.09 942.23,147.09 1014.03,218.9 1023.03,218.9 1032.64,228.5 U1.10 U1.9
NetC7_1: C7.1 R5.1 U3.4 | length 373.1
  Top Layer w10: v1(69,329) 51,311 51,138 61.24,127.76 C7.1 108,127.76 135.76,100 R5.1
  Bottom Layer w10: v1(69,329) 69,362.6 U3.4
NetC13_1: C13.1 C14.2 IC1.1 IC1.2 IC1.11 IC1.14 IC1.36 IC1.37 IC1.38 IC1.39 IC1.40 IC1.41 IC1.42 IC1.43 IC1.44 IC1.45 IC1.46 IC1.47 IC1.48 IC1.49 IC1.50 IC1.51 IC1.52 IC1.53 IC1.54 IC1.55 IC1.56 IC1.57 IC1.58 IC1.59 IC1.60 IC1.61 J1.A1 J1.A12 LED2.1 LED3.1 R10.2 R11.1 U6.6 | length 5537.5
  Top Layer w10: IC1.60 1292.46,561 1631.71,561 IC1.61 1656.97,607 1655,608.97 IC1.36 IC1.37 IC1.38 IC1.39 IC1.40 IC1.41 IC1.42 ; IC1.59 1284,1054.76 1285.97,1052.8 IC1.11 1304.61,977.99 ; IC1.14 1293.5,946.5 1304.61,957.6 1304.61,977.99 ; IC1.56 IC1.57 IC1.50 IC1.51 ; IC1.55 IC1.54 ; IC1.52 IC1.53 ; IC1.2 IC1.1 1637,1052.8 ; v1(1640,1104.71) 1637.32,1102.03 1637.32,1097.32 1637,1097 1637,1052.8 ; C13.1 2361.46,1034 ; v1(2365,1070) 2365,1037.54 2378.46,1051 2467,1051 2557.02,960.98 J1.A12 2837,960.98 2837,974 2841,978 2876,978 2893,961 2893,706 2872,685 2865.02,685 2841,709.02 J1.A1 2808,709.02 2808,537 2817,528 2817,344.52 LED3.1 ; U6.6 2685,820.16 2685,641 2664,620 C14.2 2610,530.43 2554.57,475 R10.2 2554.57,296.7 2729.27,122 ; R11.1 2729.27,122 ; LED2.1 2845.43,262.09 LED3.1 ; 1304.61,977.99 IC1.54 ; IC1.54 IC1.53 ; IC1.53 IC1.49 IC1.51 ; IC1.51 IC1.42 ; 1637,1052.8 1638.97,1054.76 IC1.58 1656.97,1032.97 1655,1031 IC1.48 IC1.47 IC1.46 IC1.45 IC1.44 IC1.43 IC1.42 ; 2729.27,122 2774,122 2790,138 LED3.1
  Bottom Layer w10: v1(1640,1104.71) 2330.29,1104.71 v1(2365,1070)
NetC14_1: C14.1 J1.A4 LED1.2 | length 778.1
  Top Layer w10: C14.1 v1(2552.91,690) ; v1(2595,1035) LED1.2 ; v1(2775,740) 2775.26,740.26 2826.28,740.26 J1.A4
  Bottom Layer w10: v1(2595,1035) 2595,732.09 v1(2552.91,690) 2735.49,690 2753.9,708.42 2753.9,718.9 v1(2775,740)
NetIC1_16: IC1.16 SW1.1 SW1.2 | length 1776.7
  Top Layer w10: v1(1190.61,945.04) 1193.29,942.36 1202.44,942.36 1261.3,883.5 IC1.16
  Bottom Layer w10: v1(1190.61,945.04) 1190.65,945 1735.63,945 SW1.1 SW1.2
NetIC1_18: IC1.18 JP1.4 | length 2235.5
  Top Layer w10: JP1.4 384.17,797.05 434.16,797.05 441.21,790 v1(445,790) ; v1(1060,890) 1088.27,861.73 1128.82,861.73 1136.54,869.45 1136.54,930.55 1090.56,976.53 1081.35,976.53 1062.29,995.59 1062.29,1014.41 1075.59,1027.71 1094.41,1027.71 1167.91,954.21 1167.91,943.61 1167.95,943.57 1167.95,890.99 1238.43,820.51 IC1.18
  Bottom Layer w10: v1(445,790) 445,793.79 431.09,807.69 431.09,898.49 500.51,967.91 779.59,967.91 946.35,801.14 1203.76,801.14 1222,782.9 1222,741.66 1192.09,711.75 1192.09,670.51 1205.51,657.09 1224.49,657.09 1253.81,686.42 1253.81,796.08 1208.19,841.7 1108.3,841.7 v1(1060,890)
NetIC1_19: IC1.19 JP1.3 | length 1240.5
  Top Layer w10: JP1.3 343.9,833.39 332.95,844.33 329.62,844.33 323.35,850.6 323.35,910.66 329.62,916.93 384.89,916.93 402.96,935 v1(405,935) ; v1(1085,1005) 1152.24,937.76 1152.24,875.2 1238.43,789.02 IC1.19
  Bottom Layer w10: v1(405,935) 482.61,1012.61 778.8,1012.61 786.41,1005 v1(1085,1005)
NetIC1_20: IC1.20 JP1.2 | length 1000.7
  Top Layer w10: JP1.2 384.17,869.72 434.72,869.72 v1(510,945) ; v1(1199.09,773.41) 1201.77,770.73 1224.27,770.73 1237.48,757.52 IC1.20
  Bottom Layer w10: v1(510,945) 780,945 951.59,773.41 965,773.41 v1(1199.09,773.41)
NetIC1_21: IC1.21 JP1.1 | length 1180.9
  Top Layer w10: JP1.1 414.76,896.38 492.32,973.94 492.32,988.54 v1(493.48,989.71) ; v1(1215,680) 1215.28,680 1261.3,726.02 IC1.21
  Bottom Layer w10: v1(493.48,989.71) 520.78,989.71 525.48,985 910,985 965,930 1077.95,817.05 1210.35,817.05 1237.91,789.49 1237.91,702.91 v1(1215,680)
NetJ1_A5: J1.A5 R11.2 | length 712.9
  Top Layer w10: R11.2 2740,765.79 2760,785.79 J1.A5
NetL1_1: L1.1 R5.2 U3.6 | length 966.6
  Top Layer w10: R5.2 336.57,100 L1.1
  Bottom Layer w10: U3.6 81,437.4 81,474 99,492 424,492 441.57,474.43 L1.1
NetLED1_1: LED1.1 R12.2 | length 683.3
  Top Layer w10: R12.2 2360,948 2332,976 2332,1082 2352,1102 2655.83,1102 2675.83,1082 LED1.1
NetLED2_2: LED2.2 R13.2 | length 845.8
  Top Layer w10: R13.2 v1(2407.28,567.72) ; LED2.2 v1(2980,467)
  Bottom Layer w10: v1(2407.28,567.72) 2508,467 v1(2980,467)
NetR1_2: R1.2 U1.2 U2.2 | length 1731.5
  Top Layer w10: v1(470,836) 470,647.11 532.71,584.41 532.71,565.59 453.46,486.34 394.25,486.34 315,407.09 R1.2 719.71,290 v1(784.71,355)
  Bottom Layer w10: v1(470,836) 595.16,836 605.16,826 U2.2 ; v1(784.71,355) 788.33,355 805.61,372.28 1059.79,372.28 1082.51,349.56 1082.51,345.71 1105.24,322.99 U1.2
NetR3_2: R3.2 U1.3 U2.3 | length 1656.3
  Top Layer w10: R3.2 287.72,464.06 v1(446.65,623) 491.97,577.68 507.32,577.68 v1(510,575)
  Bottom Layer w10: v1(446.65,623) 635,623 662,650 682.39,650 727.91,695.51 727.91,756.78 712.16,772.53 669.96,772.53 665.59,776.91 636.96,776.91 625.75,788.12 625.75,806.5 U2.3 ; v1(510,575) 657.61,575 731.48,501.12 835,501.12 965,501.12 1025.44,501.12 1160.67,365.89 1160.67,309.29 1142.87,291.5 U1.3
NetR10_1: R10.1 U6.8 | length 515.1
  Top Layer w10: R10.1 2590,488 2701,599 2701,843.53 2680,864.53 U6.8
NetR12_1: R12.1 R13.1 U6.5 | length 816.3
  Top Layer w10: R12.1 2360,666 2323,629 2323,537.28 2328,532.28 R13.1 2461.19,532.28 2461.42,532.06 2496,532.06 2507,543.06 2507,684 2536,713 2595,713 2650,768 2650,805.47 U6.5
To_Lipo_Bat: C8.1 C9.1 C13.2 IC1.3 LED3.2 R9.2 U6.3 | length 2937.6
  Top Layer w10: v1(1556.57,1019) IC1.3 ; v1(1831.54,971.46) C8.1 1990,836 1958,804 1958,706 1990,674 ; R9.2 1877.72,471.72 1990,584 1990,674 ; v1(2080,640) 2024,640 1990,674 ; C13.2 2418.54,842 2435.39,825.16 2504,825.16 ; v1(2430,625) 2481.32,573.68 2481.32,557.68 v1(2484,555) 2484,805.16 2504,825.16 ; U6.3 2504,825.16 ; v1(2763,555) 2763,409.48 LED3.2
  Bottom Layer w10: v1(1556.57,1019) 1784,1019 v1(1831.54,971.46) ; v1(2080,640) 2411.21,640 2426.21,625 v1(2430,625) ; v1(2484,555) v1(2763,555)
VIN: C1.2 C3.1 C6.2 R2.2 R4.1 R6.2 R7.2 R8.2 U2.8 U3.1 U3.3 U4.B1 | length 3467.7
  Top Layer w10: v1(390,362.6) C3.1 424,412.28 439.59,427.88 503.82,427.88 539.63,463.68 539.63,527.91 575.43,563.72 575.43,612 ; v1(585.47,695) 585.47,601.96 ; R4.1 R2.2 575.43,612 ; v1(695,570) 637.24,512.24 608.7,512.24 C1.2 595,592.43 585.47,601.96 ; v1(1245,465) 1248.79,465 1263.79,450 v1(1325,450) ; 1380.86,232.2 1559.91,232.2 1607.71,184.41 1607.71,165.59 1582.39,140.28 1555.88,140.28 1522.56,106.96 C6.2 1557,105 1589.72,137.72 R6.2 1625,218 1641,234 1722.72,234 1753.43,264.72 ; R7.2 1577.72,266 1579,264.72 1753.43,264.72 ; R8.2 1762.72,274 1753.43,264.72 ; 575.43,612 585.47,601.96
  Bottom Layer w6: U4.B1 1300.36,374.61 1304.28,374.61 1345,415.33 1345,425 ; 1303.41,371.35 1305.32,371.35 1339.84,336.82 1339.84,280.16
  Bottom Layer w10: U3.3 208,362.6 ; U3.1 208,437.4 215,430.4 215,369.6 208,362.6 ; v1(390,362.6) 208,362.6 ; v1(585.47,695) U2.8 ; v1(695,570) 745,520 1060.19,520 1115.19,465 v1(1245,465) ; v1(1325,450) 1345,430 1345,425 ; 1339.84,280.16 v1(1375,245)
XTAL_32K_N: C12.2 IC1.13 U5.3 | length 767.9
  Top Layer w10: U5.3 1150.28,728.72 1093,786 1093,802.67 1021.58,874.09 1021.58,905.91 1044.09,928.42 1075.91,928.42 1086.61,917.72 C12.2 1112.31,920.4 1112.31,932.56 1084.05,960.82 1074.85,960.82 1046.58,989.09 1046.58,1020.91 1069.09,1043.42 1100.91,1043.42 1166.34,977.99 IC1.13
XTAL_32K_P: C11.2 IC1.12 U5.1 | length 867
  Top Layer w10: U5.1 1023,625.55 988,660.55 988,1113.72 992,1117.72 C11.2 1108.77,1117.72 1217,1009.49 IC1.12
pads on no net: IC1.4 IC1.6 IC1.7 IC1.9 IC1.10 IC1.15 IC1.17 IC1.22 IC1.23 IC1.24 IC1.25 IC1.28 IC1.29 IC1.30 IC1.31 IC1.32 IC1.33 IC1.34 IC1.35 J1.A6 J1.A7 J1.A8 J1.A9 J1.B5 J1.B6 J1.B7 J1.B8 J1.MH1 J1.MH2 J1.MP1 J1.MP2 J1.MP3 J1.MP4 JP1.10 JP1.11 U1.1 U1.5 U1.6 U1.7 U1.8 U1.13 U1.14 U6.1 U6.2 U6.4 U6.7 U6.9

## Polygon pours and split planes (outlines as drawn)
no net on Layer 1 (split plane): 2125,20.1 965,20.1 965,1159.9 2125,1159.9
no net on Layer 1 (split plane): 3139.9,20.1 2245,20.1 2245,1159.9 3139.9,1159.9
no net on Layer 1 (split plane): 835,20.1 20.1,20.1 20.1,1159.9 835,1159.9
no net on Layer 2 (split plane): 3139.9,20.1 20.1,20.1 20.1,1159.9 3139.9,1159.9